# Altium PCB uku207_220_2.PcbDoc (part 3 of 4)
Units mm, origin at the board's own origin, x right, y up, seen from the top; angles counter-clockwise.
Board outline 334.15 x 155.4 mm, 2 copper layers (Top Layer, Bottom Layer); 372 components, 588 nets, 1281 pads, 677 vias.
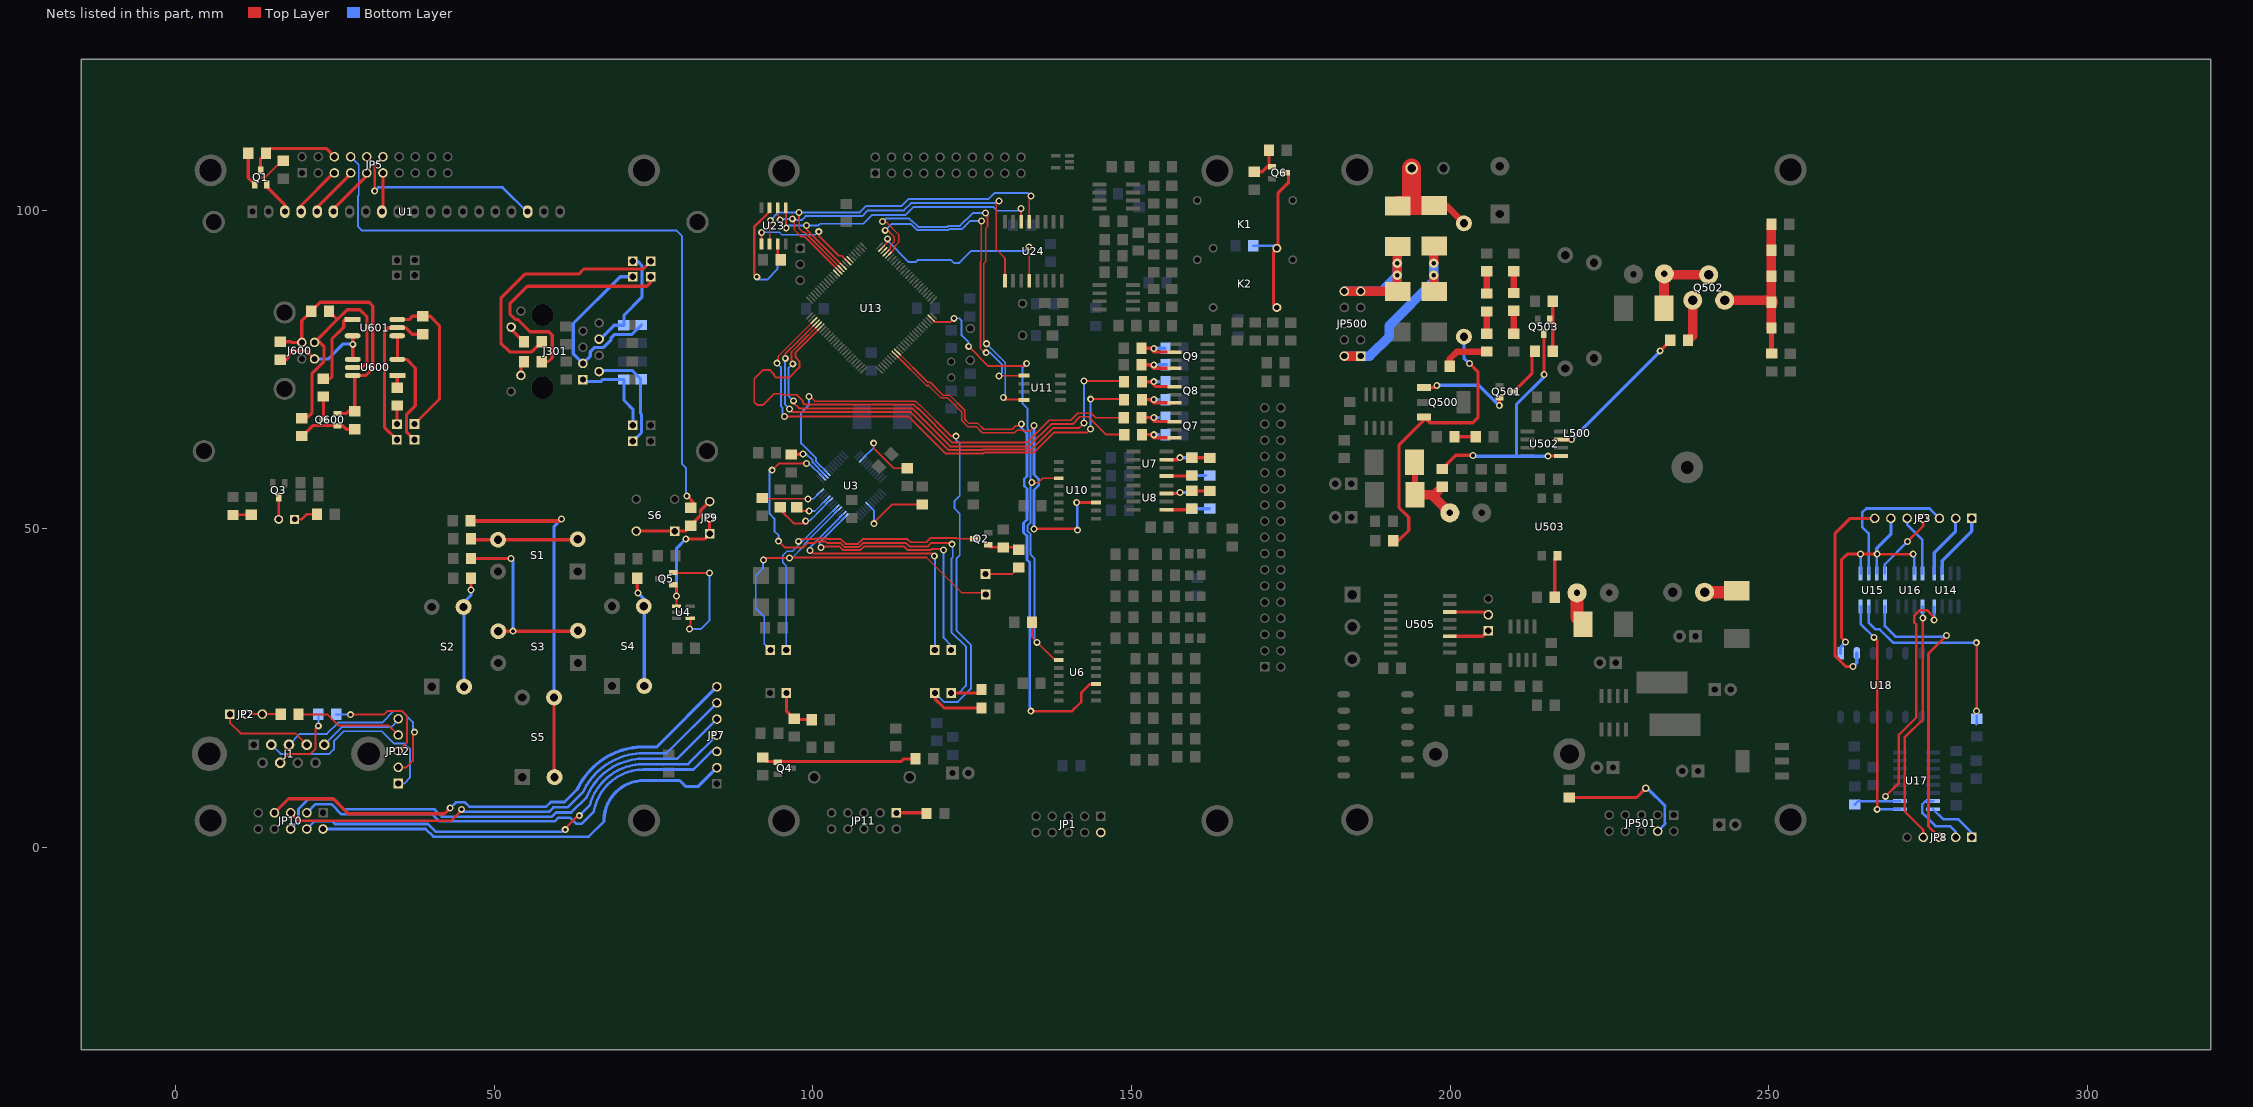
[diagram p3: the nets of this part, all layers, seen from the top]

## Via types
v1: diameter 1.1, hole 0.6, Top Layer to Bottom Layer, 590 vias
v2: diameter 1.3, hole 0.7, Top Layer to Bottom Layer, 36 vias
v3: diameter 1.5, hole 1, Top Layer to Bottom Layer, 18 vias
v4: diameter 1.5, hole 0.7, Top Layer to Bottom Layer, 16 vias
v5: diameter 1.2, hole 0.7, Top Layer to Bottom Layer, 13 vias
v6: diameter 1.4, hole 0.9, Top Layer to Bottom Layer, 3 vias
v7: diameter 1.2, hole 0.6, Top Layer to Bottom Layer, 1 vias

## Nets (pads, with @x,y where several pads share a name; then routed paths per layer and width w, separated by ;. In a path a pad name is that pad's centre, name@x,y a point inside that pad or via, vN(x,y) a via of type N, cw(c..) or ccw(c..) an arc to the next point about the centre after c; other vN are vias at no path point) (continued)
NetC600_1: C600.1 J600.2 U600.4 U601.3 | length 17.4
  Top Layer w0.5: C600.1@16.397,76.553 17.37,76.553 17.726,76.908 17.726,77.272 18.412,77.958 20.516,77.958 J600.2@21.812,76.663 ; U601.3@27.788,80.301 27.81,80.301 v1(27.81,78.97) 27.81,76.599 U600.4@27.812,76.599
  Bottom Layer w0.5: J600.2@21.812,76.663 23.949,76.663 26.307,79.02 v1@27.807,79.02
NetC600_2: C600.2 J600.4 Q600.2 R601.2 R602.1 U600.6 | length 41.3
  Top Layer w0.5: C600.2@16.397,79.353 18.109,79.353 18.199,79.263 J600.4@19.812,79.263 19.812,82.667 R601.2@21.295,84.15 ; R601.2@21.297,84.147 R601.2@21.295,84.15 ; Q600.2@25.406,68.112 26.819,68.112 27.155,68.447 R602.1@28.103,68.447 28.114,68.447 U600.6@28.114,74.059 ; U600.6@27.812,74.059 U600.6@28.114,74.059 ; R601.2@21.295,84.15 22.697,85.552 30.375,85.552 30.959,84.968 30.959,75.202 29.816,74.059 U600.6@28.114,74.059
NetD1_2: D1.2 R8.2 | length 3
  Top Layer w0.4: D1.2@9.017,52.203 11.897,52.203 R8.2@11.95,52.15
NetD3_1: D3.1 JP5.8 | length 106.5
  Top Layer w0.5: v1@80.22,55.264 80.27,55.209 81.438,53.912 D3.1@81.438,53.355
  Bottom Layer w0.3: JP5.8@27.47,108.39 28.75,107.11 28.75,102.35 28.6,102.2 28.6,97.45 29.2,96.85 78.6,96.85 79.45,96 79.45,60.2 80.1,59.55 80.1,55.25 80.153,55.197 80.17,55.214 v1@80.22,55.264
  other v1: 80.22,55.164
NetD3_2: D3.2 JP9.3 S6.1 | length 13.7
  Top Layer w0.5: S6.1@72.309,49.651 S6.1@78.309,49.651 80.009,49.651 D3.2@80.67,50.313 ; D3.2@80.838,50.505 80.838,50.588 82.4,52.15 82.4,52.93 83.792,54.322 JP9.3@83.8,54.33
NetD5_1: D5.1 K1.5 K2.5 Q6.3 | length 26.3
  Top Layer w0.5: K2.5@172.806,84.74 172.3,85.245 172.3,93.534 K1.5@172.806,94.04 173,94.234 173,102.75 174.65,104.4 174.65,105.62 Q6.3@174.394,105.877
  Bottom Layer w0.4: D5.1@169.1,94.45 172.395,94.45 K1.5@172.806,94.04
NetD20_2: 
NetD101_1: 
NetD101_2: 
NetD102_1: 
NetD103_1: 
NetD105_1: 
NetD105_2: 
NetD106_1: 
NetD116_2: 
NetD500_1: 
NetD500_2: D500.2 JP501.4 | length 21.4
  Top Layer w0.5: D500.2@218.651,7.847 229.244,7.847 v5(230.697,9.3)
  Bottom Layer w0.4: 233.7,3.95 233.7,6.55
  Bottom Layer w0.5: v5(230.697,9.3) 230.95,9.3 233.7,6.55 ; JP501.4@232.558,2.56 233.7,3.703 233.7,3.95
  Bottom Layer w0.6: v5(230.697,9.3) v5@230.797,9.4
NetD502_1: D502.1 D503.1 L500.4 R521.1 | length 14
  Top Layer w1: D503.1@194.388,60.471 194.488,60.371 D502.1@194.488,55.37
  Top Layer w1.5: D502.1@194.488,55.37 197.52,55.37 R521.1@198.757,56.607 ; 197.094,55.37 L500.4@199.95,52.513
NetD503_1: 
NetD504_1: D504.1 L500.6 | length 5.3
  Top Layer w2: L500.6@219.905,39.96 219.905,36.014 D504.1@220.866,35.053
NetD505_1: D505.1 D509.2 JP500.9 JP500.10 | length 26.7
  Top Layer w1: D509.2@191.641,87.279 D509.2@191.698,87.222 ; D505.1@191.698,94.274 D505.1@191.748,94.324
  Top Layer w1.5: JP500.10@183.407,87.279 D509.2@191.641,87.279 ; D509.2@191.698,87.222 D505.1@191.698,94.274
  Bottom Layer w1.5: JP500.10@183.407,87.279 JP500.9@185.947,87.279 189.179,87.279 v4(191.7,89.8) v4(191.698,91.7)
NetD505_2: D505.2 D506.2 R508.2 R514.2 | length 17.3
  Top Layer w1: D506.2@197.505,100.735 199.366,100.735 R514.2@202.158,97.943
  Top Layer w3: D505.2@191.854,100.735 D506.2@197.505,100.735 ; 193.947,100.735 193.954,100.741 R508.2@193.954,106.579
NetD506_1: D506.1 D508.2 JP500.1 JP500.2 | length 30.5
  Top Layer w1: D506.1@197.35,94.424 D506.1@197.4,94.424
  Top Layer w1.5: JP500.2@183.407,77.119 JP500.1@185.947,77.119 ; D508.2@197.4,87.322 v4(197.4,89.8) ; v4(197.4,91.7) D506.1@197.4,94.385
  Bottom Layer w1.5: JP500.2@183.407,77.119 187.369,77.119 190.45,80.2 190.45,81.9 197.4,88.85 v4(197.4,91.7)
NetD507_1: D507.1 L500.2 Q502.2 | length 12.4
  Top Layer w1.5: D507.1@233.548,84.627 L500.2@233.548,89.962 ; L500.2@233.756,89.875 Q502.2@240.561,89.875
  Top Layer w2: L500.2@233.548,89.962 L500.2@233.609,90.023 L500.2@233.756,89.876
NetD510_1: D510.1 L500.8 | length 3.7
  Top Layer w2: L500.8@239.911,40.06 D510.1@243.595,40.06
NetDS1_1: DS1.1 R21.1 | length 3.8
  Top Layer w0.4: DS1.1@18.685,51.486 19.778,51.486 20.554,52.262 R21.1@22.194,52.262
NetDS1_2: DS1.2 Q3.3 | length 3.6
  Top Layer w0.4: DS1.2@16.111,51.42 16.204,51.513 16.204,54.945 Q3.3@16.194,54.955
NetFU100_1: 
NetFU500_1: 
NetJ1_2: J1.2 JP12.1 | length 32.4
  Bottom Layer w0.3: J1.2@15.039,16.134 16.472,14.7 24.147,14.7 24.847,15.4 24.847,16.7 26.397,18.25 32.347,18.25 34.297,16.3 35.897,16.3 36.797,15.4 36.797,10.997 35.85,10.05 JP12.1@34.95,10.05
NetJ1_3: J1.3 JP12.2 | length 31.1
  Top Layer w0.3: JP12.2@34.95,12.59 36.24,12.59 37.25,13.6 v1@37.25,18.1
  Bottom Layer w0.3: J1.3@17.809,16.134 19.525,17.85 23.747,17.85 25.497,19.6 32.397,19.6 34.197,21.4 35.55,21.4 37.25,19.7 v1@37.25,18.1
  other v1: 37.5,18.1
NetJ1_4: J1.4 JP2.1 | length 14.8
  Top Layer w0.3: JP2.1@8.539,20.939 8.539,19.559 10.197,17.9 18.812,17.9 J1.4@20.579,16.134
NetJ1_5: J1.5 JP12.5 | length 13.4
  Bottom Layer w0.3: J1.5@23.349,16.134 26.115,18.9 33.85,18.9 34.95,20 JP12.5@34.95,20.21
NetJ1_7: J1.7 R93.2 | length 12.1
  Top Layer w0.3: J1.7@16.424,13.294 17.78,14.65 21.147,14.65 21.947,15.45 21.947,18.65 v1(22.397,19.1)
  Bottom Layer w0.3: v1(22.397,19.1) 22.41,19.112 R93.2@22.41,20.893
NetJ301_1: J301.1 R301.1 X302.1 | length 14.5
  Bottom Layer w0.5: J301.1@63.919,73.421 64.222,73.118 66.717,73.118 67.052,73.454 R301.1@70.363,73.454 70.363,70.173 71.769,68.767 X302.1@71.769,66.266 ; 67.317,73.418 67.319,73.416
NetJ301_2: J301.2 R302.2 X303.1 | length 17.5
  Bottom Layer w0.5: J301.2@66.469,74.691 66.647,74.869 71.618,74.869 72.968,73.519 72.968,73.478 72.968,68.117 73.118,67.967 73.118,65.116 X303.1@71.769,63.766
NetJ301_3: J301.3 R303.1 X304.1 | length 31.5
  Bottom Layer w0.5: X304.1@71.769,89.566 69.761,89.566 62.416,82.221 62.416,77.464 J301.3@63.919,75.961 65.066,77.108 65.066,77.77 65.767,78.47 67.167,78.47 68.317,79.62 68.317,79.92 68.917,80.52 71.618,80.52 R303.1@73.076,81.978
NetJ301_6: J301.6 R304.2 X305.1 | length 17
  Bottom Layer w0.5: J301.6@66.469,79.771 66.668,79.771 68.85,81.954 R304.2@70.363,81.954 70.363,83.516 73.168,86.322 73.168,91.323 72.525,91.966 X305.1@71.769,91.966
NetJ301_10: J301.10 R305.1 | length 2.4
  Top Layer w0.5: J301.10@54.189,74.096 54.189,75.792 R305.1@54.657,76.259
NetJ301_11: J301.11 R306.1 | length 3.1
  Top Layer w0.5: J301.11@52.669,81.666 52.669,81.315 R306.1@54.614,79.37
NetJ600_1: J600.1 R601.1 R604.2 U600.5 | length 37.1
  Top Layer w0.5: R604.2@19.797,67.353 20.545,67.353 21.434,68.242 21.434,74.402 23.288,76.256 23.288,78.678 J600.1@22.258,79.709 ; J600.1@21.812,79.263 J600.1@22.258,79.709 ; R601.1@24.097,84.147 25.397,82.848 ; U600.5@27.812,75.329 29.308,75.329 30.045,76.066 30.045,83.26 28.921,84.384 26.933,84.384 25.397,82.848 ; J600.1@22.258,79.709 25.397,82.848
NetJP1_2: JP1.2
NetJP2_2: JP2.2 JP2.3 R94.2 | length 5.4
  Top Layer w0.3: JP2.2@11.079,20.939 16.477,20.939 R94.2@16.51,20.907
NetJP3_1: JP3.1 U14.2 | length 10.6
  Bottom Layer w0.5: U14.2@277.215,42.997 277.215,45.012 281.85,49.647 JP3.1@281.85,51.648
NetJP3_2: JP3.2 U14.1 | length 10
  Bottom Layer w0.5: U14.1@275.945,42.997 275.945,46.242 279.31,49.607 ; 279.31,49.608 JP3.2@279.31,51.647
NetJP3_3: 
NetJP3_3: 
NetJP3_3: JP3.3 U15.6 | length 23
  Bottom Layer w0.4: U15.6@265.665,42.997 265.665,49.297 264.65,50.312 264.65,52.547 265.3,53.197 275.22,53.197 JP3.3@276.77,51.647
NetJP3_4: JP3.4 U15.8 | length 11.1
  Top Layer w0.4: v1(271.75,47.997) 274.23,50.477 JP3.4@274.23,51.647
  Bottom Layer w0.4: U15.8@268.205,43.047 268.205,44.452 v1(271.75,47.997)
NetJP3_5: JP3.5 U16.8 | length 9.7
  Bottom Layer w0.4: JP3.5@271.69,51.647 271.69,50.657 274.105,48.242 U16.8@274.105,42.997
NetJP3_6: JP3.6 U15.5 U15.7 U16.7 U18.1 | length 42.6
  Top Layer w0.4: v1(267,46.047) v1(272.65,46.047)
  Top Layer w0.5: v1(262.05,32.247) 261.4,32.897 261.4,45.147 262.3,46.047 v1(267,46.047)
  Bottom Layer w0.4: U15.5@264.395,42.997 v1@264.395,46.042 ; U15.7@266.935,43.047 v1@266.935,46.047 ; v1(272.65,46.047) 272.835,45.862 U16.7@272.835,42.997
  Bottom Layer w0.5: U18.1@261.254,30.491 261.254,31.451 v1(262.05,32.247) ; v1@264.395,46.042 v1(264.4,46.047) ; v1(267,46.047) 266.935,46.112 266.935,46.932 269.15,49.147 JP3.6@269.15,51.647
NetJP3_7: JP3.7 U18.2 | length 32.2
  Top Layer w0.5: v1(263.2,28.397) 262.1,28.397 260.4,30.097 260.4,49.297 262.75,51.647 JP3.7@266.61,51.647
  Bottom Layer w0.5: v1(263.2,28.397) 263.804,29.001 U18.2@263.804,30.491
NetJP5_5: JP5.5 U1.4 | length 8.4
  Top Layer w0.5: U1.4@19.693,99.681 19.693,100.693 24.85,105.85 JP5.5@24.93,105.85
NetJP5_6: JP5.6 Q1.3 R1.1 | length 14.6
  Top Layer w0.5: Q1.3@13.352,106.248 13.352,108.104 R1.1@14.197,108.95 14.947,109.7 23.62,109.7 JP5.6@24.93,108.39
NetJP5_7: JP5.7 U1.5 | length 8.3
  Top Layer w0.5: U1.5@22.233,99.681 22.233,100.483 27.47,105.72 JP5.7@27.47,105.85
NetJP5_9: JP5.9 U1.6 | length 8.3
  Top Layer w0.5: U1.6@24.773,99.681 24.773,100.173 30.01,105.41 JP5.9@30.01,105.85
NetJP5_10: JP5.10
NetJP5_11: JP5.11 U1.9 | length 6.2
  Top Layer w0.5: U1.9@32.393,99.681 32.55,99.838 JP5.11@32.55,105.85
NetJP5_12: JP5.12 U1.18 | length 31.8
  Top Layer w0.4: v1(31.25,103) 31.25,107.09 JP5.12@32.55,108.39
  Bottom Layer w0.4: v1(31.25,103) 31.85,103.6 51.334,103.6 U1.18@55.253,99.681
NetJP7_2: JP7.2 JP10.2 | length 68.6
  Bottom Layer w0.4: JP10.2@23.147,2.91 39.24,2.91 40.45,1.7 64.837,1.7 67.235,4.098
  Bottom Layer w0.5: 67.235,4.098 cw(c73.5,4.25) 73.497,10.516 79.1,10.516 80.016,9.6 82.007,9.6 JP7.2@84.948,12.54
NetJP7_3: JP7.3 JP10.3 | length 71.9
  Bottom Layer w0.4: JP10.3@20.607,5.45 21.957,6.8 24.447,6.8 26.047,5.2 40.35,5.2 41.45,4.1 59.5,4.1 60.1,4.7 61.9,4.7 62.85,3.75 63.76,3.75 65.616,5.605 cw(c73.5,4.25) 73.497,12.25 81.247,12.25 84.077,15.08 JP7.3@84.948,15.08
NetJP7_4: JP7.4 JP10.4 | length 72.3
  Top Layer w0.4: v1@61.1,2.95 63.15,5 v1(63.35,5) ; v1(61.15,2.8) v1@61.15,3
  Bottom Layer w0.4: JP10.4@20.607,2.91 21.847,4.15 24.547,4.15 24.997,3.7 39.6,3.7 40.85,2.45 60.6,2.45 v1@61.1,2.95 ; v1(63.35,5) 63.359,5 64.968,6.609 cw(c73.5,4.25) 73.697,13.1 80.427,13.1 JP7.4@84.948,17.62
NetJP7_5: JP7.5 JP10.6 | length 77.4
  Bottom Layer w0.4: JP10.6@18.067,2.91 19.297,4.14 19.297,6.05 20.847,7.6 24.847,7.6 26.447,6 40.65,6 41.8,4.85 59.05,4.85 59.7,5.5 62.08,5.5 64.532,7.952 cw(c73.5,4.25) 73.697,13.95 78.737,13.95 JP7.5@84.948,20.16
NetJP7_6: JP7.6 JP10.5 | length 75.5
  Top Layer w0.4: JP10.5@18.067,5.45 19.317,4.2 43.197,4.2 44.847,5.85 v1(44.847,5.997)
  Bottom Layer w0.4: v1(44.847,5.997) 45.245,5.6 58.6,5.6 59.3,6.3 61.5,6.3 63.95,8.75 ; 63.902,8.648 cw(c73.5,4.25) 63.949,8.749 cw(c73.5,4.25) 73.897,14.8 77.047,14.8 JP7.6@84.948,22.7
NetJP7_7: JP7.7 JP10.7 | length 80
  Top Layer w0.5: JP10.7@15.527,5.45 17.727,7.65 24.747,7.65 27.097,5.3 40.697,5.3 42.2,5.3 v1(43.1,6.2)
  Bottom Layer w0.4: v1(43.1,6.2) 43.974,7.074 44,7.1 45.4,7.1 46.1,6.4 58.15,6.4 58.9,7.15 61.059,7.15 63.025,9.115
  Bottom Layer w0.5: 63.025,9.115 cw(c73.5,4.25) 63.403,9.858 cw(c73.5,4.25) 73.498,15.8 75.547,15.8 ; 75.547,15.84 JP7.7@84.948,25.24
NetJP8_1: JP8.1 U17.8 | length 8.3
  Bottom Layer w0.4: U17.8@275.792,6.011 277.353,4.45 279.7,4.45 281.85,2.3 JP8.1@281.85,1.6
NetJP8_2: JP8.2 U17.7 | length 10.6
  Bottom Layer w0.4: U17.7@275.792,7.281 274.583,7.281 274.1,6.797 274.1,5.397 276.147,3.35 278.45,3.35 279.31,2.49 JP8.2@279.31,1.6
NetJP8_3: JP8.3 U15.1 | length 47.2
  Top Layer w0.4: JP8.3@276.77,1.6 275.05,3.32 275.05,30.447 276.77,32.167 277,32.397 v1(277.9,33.297)
  Bottom Layer w0.4: U15.1@268.205,37.847 268.205,34.742 269.238,33.71 269.85,33.097 277.7,33.097 v1(277.9,33.297)
NetJP8_4: JP8.4 U16.1 | length 38.6
  Top Layer w0.4: v1(274.15,35.997) 274.15,20.097 271.3,17.247 271.3,5.7 274.23,2.77 JP8.4@274.23,1.6
  Bottom Layer w0.4: U16.1@274.105,37.797 274.15,37.752 v1(274.15,35.997)
NetJP9_1: JP9.1 JP9.2 Q5.1 U4.1 | length 19.9
  Top Layer w0.3: Q5.1@78.05,41.25 78.075,41.225 78.625,40.675 v1(78.625,39.45) U4.1@78.625,37.85 ; Q5.1@78.102,41.252 Q5.1@78.149,41.252
  Top Layer w0.5: v1(80.07,48.412) 80.082,48.4 83,48.4 83.8,49.2 83.8,49.212 83.8,51.752 JP9.2@83.8,51.79
  Bottom Layer w0.5: v1(78.625,39.45) 78.625,46.967 v1(80.07,48.412)
NetJP11_1: JP11.1 R15.1 | length 4.8
  Top Layer w0.5: JP11.1@113.1,5.45 117.731,5.45 R15.1@117.838,5.343
NetJP12_3: JP12.3 R93.1 | length 17.7
  Top Layer w0.3: v1(27.447,20.85) 32.697,20.85 33.247,21.4 35.55,21.4 36.3,20.65 36.3,16.48 JP12.3@34.95,15.13
  Bottom Layer w0.3: R93.1@25.21,20.893 25.253,20.85 v1(27.447,20.85)
NetJP12_4: JP12.4 R94.1 | length 17
  Top Layer w0.3: R94.1@19.31,20.907 23.841,20.907 25.597,19.15 33.47,19.15 JP12.4@34.95,17.67
NetJP501_10: 
NetL500_10: 
NetQ1_1: Q1.1 R1.2 R2.1 | length 11.3
  Top Layer w0.3: Q1.1@12.402,104.048 13.504,105.15 14.05,105.15 16.65,107.75 R2.1@16.897,107.75
  Top Layer w0.5: R1.2@11.397,108.95 11.397,105.052 Q1.1@12.402,104.048
NetQ1_2: Q1.2 U1.3 | length 6.2
  Top Layer w0.5: Q1.2@14.302,104.048 14.302,103.698 17.153,100.847 U1.3@17.153,99.781 ; U1.3@17.153,99.681 U1.3@17.153,100.397
NetQ2_1: Q2.1 R14.1 R85.1 | length 5.2
  Top Layer w0.4: Q2.1@127.431,47.511 127.471,47.471 127.843,47.099 R85.1@129.838,47.099 131.949,47.099 R14.1@132.325,46.723
NetQ2_3: Q2.3 U3.17 X2.1 | length 55.5
  Top Layer w0.3: v1(97.75,48.05) 98.1,48.4 100.284,48.4 100.375,48.491 102.212,48.491 102.303,48.4 104.379,48.4 105.132,47.647 107.072,47.647 107.824,48.4 114.85,48.4 115.35,47.9 117.8,47.9 118.5,48.6 122.5,48.6 122.649,48.452 Q2.3@125.302,48.452
  Bottom Layer w0.25: X2.1@95.85,31 95.8,31.05 95.8,44.233 95.274,44.759 95.274,45.812 95.982,46.519 96.854,46.519 98.068,47.732 U3.17@103.635,53.3 ; U3.17@103.6,53.3 U3.17@103.635,53.3 ; U3.17@103.64,53.305 U3.17@103.635,53.3
NetQ4_1: Q4.1 R22.2 R23.2 | length 24.4
  Top Layer w0.5: R23.2@92.15,14.1 92.743,13.507 Q4.1@94.498,13.507 ; Q4.1@94.498,13.398 94.603,13.503 113.879,13.503 114.285,13.91 R22.2@116.092,13.91
NetQ5_2: Q5.2 U4.4 | length 18.6
  Top Layer w0.3: Q5.2@78.1,43.2 78.125,43.175 78.2,43.1 v1(83.8,43.1) ; v1(80.65,34.3) 80.775,34.425 U4.4@80.775,35.95
  Bottom Layer w0.3: v1(80.65,34.3) 82.45,34.3 83.8,35.65 v1(83.8,43.1)
NetQ6_1: Q6.1 R72.2 R74.2 | length 5.4
  Top Layer w0.5: R72.2@169.293,106.026 170.493,106.026 171.291,106.825 Q6.1@172.047,106.825 ; Q6.1@171.55,107.083 171.55,109.384 R74.2@171.55,109.428
NetQ7_2: Q7.2 R31.2 R34.2 | length 6.2
  Top Layer w0.5: R31.2@151.638,67.493 151.644,67.5 152.95,67.5 153.125,67.325 153.175,67.275 153.225,67.225 153.61,66.84 Q7.2@156.762,66.84
  Bottom Layer w0.5: v1@153.5,67.45 154.25,67.45 154.263,67.493
  other v1: 153.5,67.5
NetQ7_4: Q7.4 R38.2 R39.2 | length 6.1
  Top Layer w0.5: R38.2@151.65,64.8 152.95,64.8 153.139,64.611 153.189,64.561 153.239,64.511 153.45,64.3 153.5,64.3 Q7.4@156.762,64.3
  Bottom Layer w0.5: v1(153.5,64.772) 154.172,64.772 154.2,64.8 154.263,64.793
NetQ8_2: Q8.2 R30.2 R77.2 | length 6.2
  Top Layer w0.5: R30.2@151.638,73.093 152.944,73.093 152.95,73.1 153.128,72.922 153.228,72.822 153.715,72.335 Q8.2@156.75,72.335
  Bottom Layer w0.5: v1(153.5,73.093) 154.263,73.093
NetQ8_4: Q8.4 R37.2 R78.2 | length 6.1
  Top Layer w0.5: R37.2@151.638,70.293 152.95,70.293 153.125,70.118 153.175,70.068 153.225,70.018 153.449,69.795 153.5,69.795 Q8.4@156.75,69.795
  Bottom Layer w0.5: v1(153.5,70.293) 154.263,70.293
NetQ9_2: Q9.2 R79.2 R81.2 | length 7.2
  Top Layer w0.5: R79.2@151.588,78.343 152.9,78.343 ; 152.9,78.3 152.9,78.343 ; Q9.2@156.75,77.735 153.565,77.735 153.25,78.05 153.2,78.1 153.15,78.15 152.957,78.343 152.9,78.343
  Bottom Layer w0.5: v1@153.5,78.343 R81.2@155.212,78.343
  other v1: 153.5,78.3
NetQ9_4: Q9.4 R80.2 R82.2 | length 6.7
  Top Layer w0.5: R80.2@151.588,75.743 152.894,75.743 152.9,75.75 153.1,75.55 153.15,75.5 153.2,75.45 153.455,75.195 153.5,75.195 Q9.4@156.75,75.195
  Bottom Layer w0.5: 154.213,75.743 R82.2@155.312,75.743 R82.2@155.5,75.743
  other v1: 153.5,75.75
NetQ10_1: 
NetQ10_3: 
NetQ10_3: 
NetQ11_1: 
NetQ11_1: 
NetQ11_3: 
NetQ500_1: Q500.1 Q501.2 | length 14.5
  Top Layer w0.5: Q500.1@195.9,72.168 197.568,72.168 v1(197.9,72.5) ; v1(207.7,69.35) 207.748,69.398 Q501.2@207.748,70.548
  Bottom Layer w0.5: v1(197.9,72.5) 197.95,72.55 204.5,72.55 v1(207.7,69.35)
NetQ500_3: Q500.3 R514.1 R520.1 | length 46
  Top Layer w0.5: R520.1@191.058,48.157 191.1,48.2 191.95,48.2 193.5,49.75 193.5,51.8 191.95,53.35 191.95,63.15 195.9,67.1 Q500.3@195.9,67.568 196.818,66.65 203.55,66.65 204.35,67.45 204.35,74.65 v1(203.05,75.95)
  Bottom Layer w0.5: R514.1@202.158,80.163 202.158,76.792 203,75.95 v1(203.05,75.95)
NetQ501_1: 
NetQ501_3: Q501.3 R504.2 | length 7.8
  Top Layer w0.5: Q501.3@209.948,71.498 212.85,74.401 212.85,77.401 R504.2@213.306,77.857
NetQ502_1: Q502.1 R522.1 | length 6.6
  Top Layer w1.5: R522.1@237.317,79.577 238.061,80.321 Q502.1@238.061,85.876
NetQ502_3: Q502.3 R523.1 R525.1 R526.1 R527.1 R528.1 R529.1 | length 27.7
  Top Layer w0.8: R525.1@250.398,81.522 250.398,77.552 R523.1@250.443,77.508
  Top Layer w1.5: Q502.3@243.061,85.876 R526.1@250.108,85.876 ; R525.1@250.398,81.522 R529.1@250.398,97.776
  Top Layer w2: R526.1@250.108,85.876 R526.1@250.398,85.585
NetQ503_1: Q503.1 R500.2 R504.1 | length 7.9
  Top Layer w0.5: R500.2@216.092,85.743 216.092,82.358 216.106,82.345 R504.1@216.106,77.857
NetQ503_3: Q503.3 R521.2 U502.5 | length 40.6
  Top Layer w0.5: R521.2@198.757,59.407 200.9,61.55 203.55,61.55 v1(203.6,61.5) ; v1@214.698,74.25 Q503.3@214.698,80.602 ; v1(215.35,61.4) 215.411,61.461 U502.5@217.354,61.461
  Bottom Layer w0.5: v1(203.6,61.5) 203.7,61.4 v1(215.35,61.4) ; 210.4,61.4 210.4,69.55 214.75,73.9 v1(214.75,74.25)
NetQ600_1: Q600.1 R602.2 R604.1 | length 9.2
  Top Layer w0.5: R604.1@19.797,64.553 19.885,64.553 21.544,66.212 Q600.1@25.406,66.212 26.254,66.212 26.819,65.647 R602.2@28.103,65.647
NetQ600_3: Q600.3 R605.1 | length 3.6
  Top Layer w0.5: R605.1@23.197,70.753 23.212,70.753 23.212,67.162 Q600.3@23.206,67.162
NetR3_1: R3.1 S1.2 | length 16.8
  Top Layer w0.5: R3.1@46.362,48.457 46.519,48.3 S1.2@50.6,48.3 63.02,48.3 S1.2@63.1,48.38
NetR3_2: 
NetR3_2: 
NetR3_2: 
NetR3_2: 
NetR3_2: 
NetR3_2: 
NetR3_2: 
NetR4_1: R4.1 S2.2 | length 17.5
  Top Layer w0.5: S2.2@45.2,37.75 S2.2@45.28,37.67 ; v1(46.35,40.4) R4.1@46.35,42.2
  Bottom Layer w0.5: S2.2@45.28,25.25 45.28,37.75 45.28,38.48 46.35,39.55 v1(46.35,40.4)
NetR4_2: 
NetR5_1: R5.1 S3.2 | length 30.3
  Top Layer w0.5: R5.1@46.362,45.357 52.644,45.357 v1(52.65,45.35) ; S3.2@50.65,33.95 v1(52.95,33.95) 63.07,33.95 S3.2@63.15,34.03
  Bottom Layer w0.5: v1(52.65,45.35) 52.95,45.05 v1(52.95,33.95)
NetR5_2: 
NetR6_1: R6.1 S4.2 | length 17.4
  Top Layer w0.5: R6.1@72.45,42.3 72.45,42.257 72.45,40.05 v1(72.55,39.95)
  Bottom Layer w0.5: v1(72.55,39.95) 73.55,38.95 73.55,37.85 S4.2@73.55,25.35
NetR6_2: 
NetR7_1: R7.1 S5.2 | length 55.3
  Top Layer w0.5: S5.2@59.4,11.13 S5.2@59.4,23.55
  Top Layer w0.6: R7.1@46.3,51.25 60.25,51.25 v1(60.55,51.55)
  Bottom Layer w0.5: S5.2@59.4,23.55 59.4,50.4 v1(60.55,51.55)
NetR7_2: 
NetR7_2: 
NetR8_1: 
NetR8_1: 
NetR8_2: 
NetR8_2: 
NetR14_2: R14.2 X15.1 | length 5.7
  Top Layer w0.25: X15.1@127.091,42.919 131.291,42.919 132.31,43.938 R14.2@132.332,43.96
NetR20_1: R20.1 U3.7 | length 12.1
  Top Layer w0.3: v1(109.576,50.812) 109.576,50.976 110.525,51.925 110.9,52.3 112.438,53.838 R20.1@117.157,53.838
  Bottom Layer w0.3: U3.7@108.837,53.658 109.585,52.91 109.585,50.971 109.576,50.962 v1(109.576,50.812)
NetR22_2: 
NetR22_2: 
NetR22_2: 
NetR22_2: 
NetR22_2: 
NetR22_2: 
NetR22_2: 
NetR22_2: 
NetR22_2: 
NetR25_1: 
NetR30_2: 
NetR38_1: 
NetR42_1: R42.1 R43.2 | length 2.6
  Bottom Layer w0.5: R42.1@159.04,58.365 159.052,58.377 159.49,58.377 R43.2@161.647,58.377
NetR42_2: R42.2 U7.3 | length 3.9
  Top Layer w0.5: U7.3@155.499,60.853 157.277,60.853 v1(157.59,61.165)
  Bottom Layer w0.5: v1@157.34,61.165 v1(157.59,61.165) R42.2@159.04,61.165
NetR43_1: 
NetR43_2: 
NetR43_2: 
NetR44_1: R44.1 R45.2 | length 2.6
  Top Layer w0.5: R44.1@159.09,61.165 159.103,61.153 159.484,61.153 R45.2@161.647,61.153
NetR44_2: 
NetR44_2: R44.2 U7.1 | length 4
  Top Layer w0.5: U7.1@155.499,58.313 159.484,58.313 159.488,58.313 R44.2@159.49,58.315
NetR45_2: 
NetR49_1: R49.1 R50.2 | length 2.8
  Bottom Layer w0.5: R49.1@159.484,53.151 162.229,53.151 R50.2@162.241,53.163
NetR49_2: R49.2 U8.3 | length 4.2
  Top Layer w0.5: U8.3@155.489,55.564 157.44,55.564 v1(157.59,55.714)
  Bottom Layer w0.5: v1(157.59,55.714) 159.246,55.714 R49.2@159.484,55.951
NetR51_1: R51.1 R52.2 | length 2.8
  Top Layer w0.5: R51.1@159.484,55.976 159.508,55.951 R52.2@162.297,55.951
NetR51_2: R51.2 U8.1 | length 4.1
  Top Layer w0.5: U8.1@155.488,52.995 159.302,52.995 R51.2@159.484,53.176
NetR52_1: 
NetR53_1: 
NetR57_1: 
NetR60_1: 
NetR69_2: 
NetR83_1: 
NetR86_1: R86.1 R87.1 X6.1 | length 7.4
  Top Layer w0.5: X6.1@95.85,24.25 95.85,21.456 R87.1@97.094,20.212 97.206,20.1 99.838,20.1 R86.1@99.85,20.1
NetR90_2: R90.2 U14.8 U17.10 | length 45
  Top Layer w0.4: v1(268.3,8.047) 270.4,10.147 270.4,17.697 273.15,20.447 273.15,34.997 272.8,35.347 272.8,36.347 273.7,37.247 274.8,37.247 275.95,36.097 v1(275.95,35.697)
  Bottom Layer w0.4: R90.2@263.509,6.76 264.03,7.281 U17.10@270.592,7.281 ; 268.3,7.281 v1(268.3,8.047) ; U14.8@275.945,37.797 275.95,37.792 v1(275.95,35.697)
NetR91_1: R91.1 U15.3 | length 33.6
  Top Layer w0.4: v1(282.55,32.147) 282.6,32.097 v1(282.6,21.447)
  Bottom Layer w0.4: U15.3@265.665,37.847 U15.3@265.665,37.797 265.665,35.282 266.7,34.247 267.4,34.247 269.5,32.147 v1(282.55,32.147) ; 282.557,19.36 282.6,19.403 v1(282.6,21.447)
NetR95_1: R95.1 U23.3 | length 2.4
  Top Layer w0.4: R95.1@94.45,92.35 94.485,92.385 U23.3@94.485,94.7
NetR96_2: R96.2 U23.7 | length 17.7
  Top Layer w0.4: v1(91.2,89.55) 90.8,89.95 90.8,97.35 93.215,99.765 U23.7@93.215,100.4
  Bottom Layer w0.3: v1(91.2,89.55) 91.628,89.122 92.823,89.122 94.45,90.75 94.45,92.207 R96.2@94.45,92.3
NetR104_1: 
NetR104_2: 
NetR105_2: 
NetR110_1: 
NetR110_2: 
NetR112_1: R112.1 U3.26 X8.1 | length 81.1
  Top Layer w0.3: v1(93.624,59.215) 94.659,60.25 v1(99,60.25) ; v1(94.624,48.062) 95.586,47.1 98.513,47.1 99.213,47.8 100.363,47.8 100.574,48.011 102.013,48.011 102.224,47.8 104.3,47.8 104.933,47.167 107.27,47.167 107.903,47.8 114.6,47.8 115.15,47.25 118.05,47.25 118.6,47.8 121.65,47.8 v1(121.85,47.6)
  Top Layer w0.5: X8.1@121.7,24.25 126.47,24.25 R112.1@126.6,24.25 ; R112.1@126.81,24.46 R112.1@126.85,24.5
  Bottom Layer w0.3: v1@93.223,59.215 93.223,52.363 93.974,51.613 93.974,49.663 94.624,49.012 v1(94.624,48.062) ; v1(99,60.25) 99.417,60.25 U3.26@101.518,58.148 ; X8.1@121.7,24.25 122.9,24.25 124,25.35 124,31.55 121.75,33.8 121.75,45.35 121.95,45.55 121.95,47.5 v1(121.85,47.6)
NetR113_1: R113.1 U3.28 X7.1 | length 97
  Top Layer w0.25: v1@99.6,70.75 100.3,70.05 116.05,70.05 116.65,69.45 ; 116.8,69.45 121.7,64.55 v1(122.45,64.55)
  Top Layer w0.5: X7.1@119.1,24.25 X7.1@119.15,24.25 119.15,23.35 120.607,21.893 R113.1@126.47,21.893
  Bottom Layer w0.3: v1(99.4,70.75) 99.4,69.5 98.15,68.25 98.15,63.4 100.5,61.05 100.5,60.581 100.807,60.273 U3.28@102.226,58.855 ; X7.1@119.15,24.25 120.55,22.85 122.75,22.85 124.8,24.9 124.8,31.8 122.55,34.05 122.55,45.4 123.05,45.9 123.05,52.4 122.25,53.2 122.25,54.4 123.05,55.2 123.05,63.4 122.45,64 v1(122.45,64.55)
NetR114_1: R114.1 U3.27 | length 6
  Top Layer w0.5: R114.1@97.5,61.75 97.55,61.7 98.4,61.7 v1(98.45,61.75)
  Bottom Layer w0.3: v1(98.45,61.75) 99,61.75 99.95,60.8 99.95,60.424 U3.27@101.872,58.502
NetR115_1: R115.1 U3.21 | length 5.7
  Top Layer w0.3: R115.1@97.507,53.388 98.081,52.813 v1(99.425,52.813)
  Bottom Layer w0.25: v1(99.425,52.813) 100.32,52.813 U3.21@102.226,54.719
NetR116_1: R116.1 U3.20 | length 12.7
  Top Layer w0.25: R116.1@94.907,53.388 94.907,53.043 96.1,51.85
  Top Layer w0.3: R116.1@94.907,53.388 94.907,53.043 94.907,52.931 96.974,50.863 98.875,50.863 99.075,50.863 v1@99.175,50.963
  Bottom Layer w0.25: v1(98.875,51.263) 99.525,51.263 100.514,52.252 100.514,52.3 U3.20@102.579,54.365
NetR117_2: R117.2 U3.24 | length 9.6
  Top Layer w0.25: R117.2@92.044,54.712 v1(99.238,54.712) v1@99.25,54.7
  Bottom Layer w0.25: v1(99.238,54.712) 100.098,54.712 U3.24@101.165,55.78
NetR120_1: R120.1 U3.39 | length 10.6
  Top Layer w0.25: v1(109.55,63.45) 109.55,62.65 112.688,59.512 R120.1@114.794,59.512
  Bottom Layer w0.3: U3.39@107.776,60.977 109.55,62.75 v1(109.55,63.45)
NetR305_2: R305.2 X307.1 | length 39.3
  Top Layer w0.5: R305.2@57.514,76.269 58.515,76.269 59.115,76.869 59.115,80.37 58.565,80.92 55.614,80.92 53.664,82.871 53.313,82.871 52.463,83.721 52.463,85.321 55.214,88.072 73.919,88.072 74.569,88.722 X307.1@74.569,89.566
NetR306_2: R306.2 X308.1 | length 40.6
  Top Layer w0.5: R306.2@57.457,79.359 55.867,77.77 52.413,77.77 51.05,79.133 51.05,86.2 54.823,89.973 63.266,89.973 64.066,90.773 73.376,90.773 X308.1@74.569,91.966
NetR502_2: R502.2 R519.2 | length 3.3
  Top Layer w0.5: R519.2@200.693,64.459 204.006,64.459 R502.2@204.008,64.457
NetR504_1: 
NetR505_2: 
NetR505_2: 
NetR509_1: R509.1 R510.2 | length 3.5
  Top Layer w1: R510.2@205.766,86.914 R509.1@205.766,90.416
NetR510_1: R510.1 R511.2 | length 3.5
  Top Layer w1: R511.2@205.766,80.612 R510.1@205.766,84.114
NetR511_1: R511.1 R512.2 | length 7.4
  Top Layer w1: R512.2@199.942,75.554 199.942,76.692 201.062,77.812 R511.1@205.766,77.812
NetR515_1: R515.1 R516.2 | length 3.4
  Top Layer w1: R516.2@209.955,87.012 R515.1@209.955,90.415
NetR516_1: R516.1 R517.2 | length 3.6
  Top Layer w1: R517.2@209.955,80.612 R516.1@209.955,84.212
NetR522_2: R522.2 U502.7 | length 23.7
  Top Layer w0.5: U502.7@217.354,64.001 v1(219.049,64.001) ; v1(232.95,77.95) 234.517,79.517 R522.2@234.517,79.577
  Bottom Layer w0.5: v1(219.049,64.001) 232.95,77.902 v1(232.95,77.95)
NetR530_2: R530.2 U503.2 | length 6.9
  Top Layer w0.5: R530.2@216.277,39.415 R530.2@216.4,39.293 216.4,45.35 U503.2@216.85,45.8
NetR600_1: R600.1 X601.1 | length 3
  Top Layer w0.5: X601.1@34.748,66.453 34.744,66.457 34.744,69.353 R600.1@34.797,69.353
NetR600_2: R600.2 U600.1 | length 1.9
  Top Layer w0.5: R600.2@34.797,72.153 34.795,72.153 34.795,74.059 U600.1@34.812,74.059
NetR603_1: R603.1 U601.5 X602.1 | length 24.5
  Top Layer w0.5: X602.1@34.744,63.964 32.813,65.895 32.813,81.012 33.372,81.571 U601.5@34.788,81.571 36.139,81.571 37.157,80.553 R603.1@38.797,80.553
NetR603_2: R603.2 U601.6 X600.1 | length 24.5
  Top Layer w0.5: U601.6@34.788,82.841 36.645,82.841 37.157,83.353 R603.2@38.797,83.353 39.976,83.353 41.424,81.905 41.424,70.386 X600.1@37.497,66.459
NetR605_2: R605.2 U601.1 | length 12.5
  Top Layer w0.5: R605.2@23.197,73.553 24.228,73.553 24.558,73.883 24.558,79.812 26.387,81.641 26.387,82.682 26.546,82.841 U601.1@27.788,82.841
NetS2_1: 
NetU1_1: 
NetU1_4: 
NetU1_5: 
NetU3_13: U3.13 X4.1 | length 43.1
  Top Layer w0.3: v1@101.324,46.861 101.399,46.936 101.674,47.211 104.211,47.211 104.734,46.687 107.469,46.687 107.993,47.211 114.328,47.211 114.878,46.661 118.479,46.661 118.668,46.85 120.35,46.85 v1(120.5,46.7)
  Bottom Layer w0.3: v1@101.05,46.75 101.05,47.061 101.05,47.887 U3.13@105.054,51.89 ; v1(120.5,46.7) 120.5,32.9 121.7,31.7 X4.1@121.7,31
  other v1: 101.274,47.061
NetU3_14: U3.14 X3.1 | length 42.1
  Top Layer w0.3: v1@99.574,46.661 v1(99.574,46.611) 100.074,46.111 118.69,46.111 v1(119.05,45.75)
  Bottom Layer w0.3: v1@99.424,46.961 U3.14@104.7,52.244 ; v1(119.05,45.75) 119.15,45.65 X3.1@119.15,31
NetU3_16: U3.16 X1.1 X16.1 | length 64.3
  Top Layer w0.25: v1(96.35,45.45) 96.41,45.51 117.828,45.51 123.33,40.009 126.831,40.009 X16.1@127.131,39.709
  Top Layer w0.3: v1@92.172,45.51 92.232,45.45 92.273,45.45 v1(96.35,45.45)
  Bottom Layer w0.25: v1@92.172,45.51 92.172,45.111 92.172,43.81 91.022,42.66 91.022,37.558 92.373,36.207 92.373,31.977 X1.1@93.35,31 ; X1.1@93.3,31.05 X1.1@93.35,31 ; X1.1@93.3,31.05 X1.1@93.35,31 ; v1@96.386,45.45 96.713,45.45 98.625,47.362 98.625,47.583 U3.16@103.993,52.951
  other v1: 92.273,45.111
NetU5_1: 
NetU8_3: 
NetU8_7: 
NetU8_8: 
NetU11_5: 
NetU14_3: 
NetU14_4: 
NetU14_5: 
NetU14_6: 
NetU14_12: 
NetU14_13: 
NetU14_14: 
NetU15_3: 
NetU15_3: 
NetU15_3: 
NetU15_3: 
NetU15_4: U15.4 U17.9 | length 38.8
  Top Layer w0.4: v1(266.5,32.997) 267,32.497 v1(267,5.997)
  Bottom Layer w0.4: U15.4@264.395,37.847 264.395,35.102 v1(266.5,32.997) ; v1(267,5.997) 267.013,6.011 U17.9@270.592,6.011 268.339,6.011
NetU15_5: 
NetU15_5: 
NetU15_5: 
NetU15_5: 
NetU15_5: 
NetU15_5: 
NetU15_7: 
NetU15_7: 
NetU15_9: 
NetU15_10: 
NetU15_15: 
NetU16_3: 
NetU16_4: 
NetU16_6: 
NetU19_4: 
NetU21_1: 
NetU21_2: 
NetU103_4: 
NetU503_4: 
NetU505_3: U505.3 X500.1 | length 6.4
  Top Layer w0.5: U505.3@199.922,33.145 205.129,33.145 X500.1@205.995,34.012
NetU505_6: U505.6 X501.1 | length 6.3
  Top Layer w0.5: U505.6@199.922,36.955 205.552,36.955 X501.1@205.995,36.512
NetU600_3: U600.3 U601.4 X607.1 | length 19.5
  Top Layer w0.5: U601.4@34.788,80.301 34.82,80.301 U600.3@34.82,76.599 ; U600.3@34.812,76.599 36.255,76.599 37.614,75.24 37.614,69.296 36.217,67.899 36.217,65.239 X607.1@37.497,63.959
NetX11_1: 
NetX13_1: 
NetX15_1: 
NetX19_1: 
NetX23_1: 
NetX32_1: 
NetX33_1: 
OFF1: 
OFF2: 
P0_0: U11.4 U13.46 | length 59.5
  Top Layer w0.25: v1@110.95,98.1 110.9,98.15 110.9,98.2 110.95,98.15 111.5,98.15 113.45,96.2 113.45,94.95 112.7,94.2 112.7,93.807 U13.46@111.852,92.959 ; v1(127.1,99.55) 127.4,99.25 127.4,97.45 127.1,97.15 127.1,91.95 126.8,91.65 126.8,79.5 v1(127.25,79.05) ; v1@129.883,70.3 133.1,70.3 133.153,70.247 U11.4@133.172,70.228 ; U11.4@133.1,70.25 133.145,70.25 U11.4@133.15,70.245 133.167,70.228 U11.4@133.172,70.228 ; U11.4@133.2,70.2 U11.4@133.172,70.228
  Bottom Layer w0.25: v1@127.1,99.5 v1(127.1,99.55) ; v1(127.25,79.05) 130.2,76.1 130.2,71.05 v1@129.825,70.675
  Bottom Layer w0.3: v1(110.95,98.25) 111.4,98.7 115.1,98.7 115.47,98.33 115.549,98.33 116.499,97.38 121.101,97.38 121.251,97.53 123.08,97.53 125.1,99.55 v1(127.1,99.55)
  other v1: 129.883,70.618
P0_1: U11.1 U13.47 | length 52
  Top Layer w0.25: v1(111.35,96.85) 111.5,97 111.6,97 112.75,95.85 112.75,95.05 112.15,94.45 112.15,93.964 U13.47@111.498,93.312 ; v1(126.45,98.3) 126.45,92.1 126.335,91.985 126.335,91.884 126.3,91.848 126.3,78.3 126.95,77.65 v1(127.2,77.65) v1@127.25,77.65 ; v1(129.2,74) 129.255,74.055 U11.1@133.15,74.055
  Bottom Layer w0.3: v1(111.35,96.85) 112.35,97.85 115.35,97.85 116.3,96.9 121.3,96.9 121.45,97.05 123.4,97.05 123.8,97.45 ; 123.85,97.45 123.8,97.45 ; v1(126.45,98.3) 124.65,98.3 123.8,97.45 ; v1(127.2,77.65) 127.8,77.65 129.7,75.75 129.7,74.5 v1(129.2,74)
P0_2: R15.2 U13.98 | length 94.6
  Top Layer w0.25: v1(104.65,73.5) 105.121,73.5 U13.98@107.256,75.634 ; v1(106.35,72.4) 106.782,71.968 116.932,71.968 117.35,71.55 117.7,71.55 ; 117.75,71.55 117.7,71.55 ; v1@124.9,64.75 124.5,64.75 124.3,64.75 122.35,66.7 122.35,67.95 120.65,69.65 119.6,69.65 117.725,71.525 117.7,71.55
  Top Layer w0.5: R15.2@120.797,5.3 123.297,5.3 124.047,6.05 v5(126.8,6.05)
  Bottom Layer w0.3: v1(104.65,73.5) 106,72.15 v1@106.1,72.15 ; v1(124.5,64.6) 124.5,63.65 124.15,63.3 124.15,34.35 125.325,33.175 126.08,32.42 126.08,25.825 126.8,25.105 126.8,10 127.397,9.403 127.397,6.647 v5(126.8,6.05)
P0_2: 
P0_2: 
P0_2: 
P0_2: 
P0_2: 
P0_3: JP11.3 R92.1 U13.99 | length 105.6
  Top Layer w0.25: U13.99@107.609,75.281 105.85,73.522 105.85,73.3 105.331,72.781 105.331,72.069 105.9,71.5 116.7,71.5 117.15,71.05 117.5,71.05 119.35,69.2 120.408,69.2 121.8,67.807 v1(121.8,65.8) ; v1(123.25,53.85) 123.263,53.838 R92.1@125.188,53.837 R92.1@125.507,53.838
  Top Layer w0.3: v5(110.6,8.95) 110.65,8.9 113.5,8.9 113.95,8.45 117.85,8.45 118.2,8.8 126.2,8.8 126.25,8.85 v5(126.25,8.9)
  Bottom Layer w0.3: JP11.3@110.56,5.45 110.56,8.91 v5(110.6,8.95) ; v1(121.8,65.8) 122.8,65.8 123.5,65.1 123.5,64 123.6,63.9 123.6,34 124.486,33.114 ; 124.48,33.107 125.43,32.157 125.43,25.555 126.25,24.736 v5(126.25,8.9)
P0_3: 
P0_3: 
P0_3: 
P0_3: 
P0_3: 
P0_3: 
P0_4: R31.1 U13.81 | length 85.1
  Top Layer w0.3: U13.81@101.245,81.645 97.3,77.7 97.3,76.9 97.9,76.3 97.9,75.35 96.3,73.75 94.247,73.75 93.897,74.1 93.897,74.303 93.25,74.95 92.2,74.95 90.8,73.55 90.8,69.9 91.25,69.45 92.2,69.45 93.95,71.2 95.05,71.2 95.2,71.05 97.5,71.05 98.45,70.1 98.45,69.8 98.75,69.5 115.8,69.5 116.4,68.9 ; 116.5,68.9 121.85,63.55 133.6,63.55 137.1,67.05 140.45,67.05 141.55,68.15 143.7,68.15 144.407,67.443 R31.1@148.788,67.443
P0_5: R38.1 U13.80 | length 72.5
  Top Layer w0.25: v1(96.85,75.9) 96.65,76.1 96.65,77.75 97.85,78.95 ; 97.847,78.953 U13.80@100.892,81.998
  Top Layer w0.3: v1(96.95,70.1) 96.95,69.8 97.85,68.9 115.6,68.9 121.55,62.95 133.9,62.95 137.4,66.45 140.75,66.45 141.9,67.6 143.2,67.6 146,64.8 R38.1@148.85,64.8
  Bottom Layer w0.3: v1(96.85,75.9) 96.15,75.2 96.15,70.9 v1(96.95,70.1)
P0_6: R30.1 U13.79 | length 79.2
  Top Layer w0.25: v1(95.678,76.77) 95.678,77.478 96.55,78.35 ; 96.561,78.339 U13.79@100.538,82.317
  Top Layer w0.3: v1@96.45,68.65 96.75,68.35 115.3,68.35 121.25,62.4 126.685,62.4 126.755,62.47 134.32,62.47 137.65,65.8 141.75,65.8 v1(142.55,66.6) ; v1(142.55,73.2) 148.731,73.2 R30.1@148.838,73.093
  Bottom Layer w0.3: v1(95.678,76.77) 95.6,76.692 95.6,69.55 v1(96.35,68.8) ; v1(142.55,66.6) v1(142.55,73.2)
P0_7: R37.1 U13.78 | length 79.3
  Top Layer w0.25: v1(94.4,76) 94.6,76.2 94.6,77.121 U13.78@100.184,82.705
  Top Layer w0.3: v1(95.55,67.65) 115,67.65 120.85,61.8 126.764,61.8 126.954,61.99 134.74,61.99 137.9,65.15 143.05,65.15 v1(143.55,65.65) ; v1(143.6,70.35) R37.1@148.55,70.35
  Bottom Layer w0.3: v1(94.4,76) 95,75.4 95,69.25 95.25,69 v1@95.25,67.85 ; v1(143.55,65.65) 143.55,70.3 v1(143.6,70.35)
P0_8: R79.1 U13.77 | length 93.2
  Top Layer w0.25: v1@93.45,76.7 95.035,78.285 95.056,78.285 U13.77@99.831,83.059
  Top Layer w0.3: v1(94.25,68.4) 94.25,67.45 95,66.7 96,66.7 96.35,67.05 114.55,67.05 120.55,61.05 126.692,61.05 127.152,61.51 135.102,61.51 137.992,64.4 v1(144.55,64.4) ; v1(144.3,78.4) 145.631,77.069 147.587,77.069 148.788,78.27 R79.1@148.788,78.343
  Top Layer w0.5: R79.1@148.788,78.35 R79.1@148.8,78.35
  Bottom Layer w0.3: v1@93.45,76.7 93.3,76.55 93.3,75.8 94.4,74.7 v1@94.4,68.35 ; v1(144.3,78.4) 144.35,78.35 144.35,75.55 144.55,75.35 v1(144.55,64.4)
  other v1: 93.4,76.8
P0_8: 
P0_8: 
P0_8: 
P0_8: 
P0_8: 
P0_8: 
P0_8: 
P0_8: 
P0_8: 
P0_8: 
P0_8: 
P0_8: 
P0_8_: 
P0_8_: 
P0_8_: 
P0_9: R80.1 U13.76 | length 93.6
  Top Layer w0.25: v1@92.497,77.8 93.865,77.8 95.225,79.16 U13.76@99.477,83.413
  Top Layer w0.3: v1@93.65,66.55 94.25,66.55 94.65,66.15 96.25,66.15 96.6,66.5 114.15,66.5 120.2,60.45 126.771,60.45 127.351,61.03 135.301,61.03 138.121,63.85 142.95,63.85 143.6,63.2 v1(145.45,63.2) ; v1(145.4,75.85) R80.1@148.681,75.85
  Bottom Layer w0.3: v1@92.497,77.8 92.497,75.75 93.7,74.547 93.7,69.35 93.25,68.9 93.25,67 v1(93.65,66.6) ; v1(145.4,75.85) 145.45,75.8 v1(145.45,63.2)
  other v1: 92.397,77.85
P0_9: 
P0_9: 
P0_9_: 
P0_9_: 
P0_9_: 
P0_9_: 
P0_10: U13.48
P0_11: U13.49 U24.4 | length 32.5
  Top Layer w0.25: U13.49@110.791,94.019 111.728,94.956 v1(111.728,95.524) ; v1(133.884,94.224) 133.95,94.224 133.965,94.208 U24.4@133.965,88.925
  Bottom Layer w0.3: v1(111.728,95.524) 111.728,95.224 115.079,91.873 116.129,91.873 116.429,92.173 121.681,92.173 122.131,91.723 122.981,91.723 124.881,93.624 133.284,93.624 v1(133.884,94.224)
P0_13: 
P0_15: U13.62 U23.6 U24.1 | length 62.5
  Top Layer w0.25: U23.6@94.485,100.4 94.485,99.19 94.874,98.801 v1(94.874,98.45) ; v1(96.774,98.65) 97.05,98.374 97.05,96.97 98.17,95.85 98.707,95.85 U13.62@104.074,90.484 ; v1(129.183,101.426) 128.8,101.043 128.8,93.823 130.155,92.468 U24.1@130.155,88.925
  Bottom Layer w0.3: v1(94.874,98.45) 95.074,98.65 v1(96.774,98.65) 97.05,98.65 97.25,98.45 98.225,98.45 98.85,99.075 107.727,99.075 108.628,99.975 114.279,99.975 115.429,101.125 128.882,101.125 v1(129.183,101.426)
P0_16: U13.63
P0_17: U13.61 U23.2 U24.13 | length 62.5
  Top Layer w0.25: U23.2@93.215,94.7 93.215,98.266 v1(93.324,98.375) ; v1(97.825,99.65) 97.85,97.124 98.45,96.524 98.74,96.524 U13.61@104.427,90.837 ; U24.13@133.965,98.175 133.965,101.957 v1(134.234,102.226)
  Bottom Layer w0.3: v1(93.324,98.375) 94.598,99.65 v1(97.825,99.65) 107.377,99.65 108.403,100.675 113.929,100.675 115.029,101.776 127.582,101.776 128.482,102.676 133.784,102.676 v1(134.234,102.226)
P0_18: U13.60 U23.5 U24.14 | length 52.3
  Top Layer w0.25: v1(99.025,97.625) 99.025,96.946 U13.60@104.781,91.191
  Top Layer w0.3: v1@95.75,97.725 95.755,97.73 U23.5@95.755,100.4 ; U24.14@132.683,98.175 v1(132.683,100.275) v1@132.683,100.475
  Bottom Layer w0.3: v1@95.75,97.725 95.85,97.625 v1(99.025,97.625) 100.875,97.625 101.125,97.875 107.927,97.875 109.328,99.275 114.579,99.275 115.779,100.475 128.382,100.475 128.932,99.925 132.333,99.925 v1(132.683,100.275)
  other v1: 95.824,97.224
P0_19: U13.59
P0_19: 
P0_20: U13.58 U23.1 | length 18.1
  Top Layer w0.25: U23.1@91.945,94.7 91.945,96.496 v1(91.973,96.524) ; v1(100.925,96.624) 100.925,96.001 104.076,92.85 104.536,92.85 U13.58@105.488,91.898
  Bottom Layer w0.25: v1(91.973,96.524) 92.023,96.574 94.724,96.574 95.174,96.124 100.425,96.124 v1(100.925,96.624)
P0_21: U13.57
P0_23: U6.3 U13.9 | length 85.1
  Top Layer w0.25: U13.9@113.266,77.756 118.022,73 118.4,73 120.4,71 121.45,71 123.85,68.6 123.85,67.2 124.5,66.55 125.9,66.55 126.8,65.65 131.3,65.65 131.85,66.2 132.7,66.2 v1@132.9,66.2
  Top Layer w0.4: v1(134.2,21.4) 140.686,21.4 142.086,22.8 142.086,24.256 143.467,25.638 U6.3@144.43,25.638
  Bottom Layer w0.4: v1@132.65,66.45 v1(132.7,66.45) 132.7,65.9 133.6,65 133.6,58.281 133.184,57.865 133.184,56.714 133.6,56.298 133.6,51.45 133.05,50.9 133.05,49.45 133.6,48.9 133.6,45.15 134.05,44.7 134.05,21.55 v1(134.2,21.4)
P0_24: U10.3 U13.8 | length 58.8
  Top Layer w0.25: U13.8@112.912,77.402 117.815,72.5 118.15,72.5 120.1,70.55 121.15,70.55 123.35,68.35 123.35,67 124.3,66.05 125.65,66.05 126.6,65.1 131.65,65.1 132.05,65.5 132.9,65.5 133.05,65.35 134.1,65.35 v1@134.6,65.85
  Top Layer w0.4: v1(134.7,50) 141.3,50 v1(141.5,49.8) ; v1(141.405,54.145) U10.3@144.425,54.145
  Bottom Layer w0.4: v1@134.6,65.85 134.7,65.75 134.7,58.549 135.434,57.815 135.434,56.814 134.7,56.08 v1(134.7,50) ; v1(141.405,54.145) 141.5,54.05 v1(141.5,49.8)
  other v1: 134.7,66.2
P0_25: C28.1 R40.1 R41.1 U13.7 | length 112.4
  Top Layer w0.25: U13.7@112.559,77.049 117.558,72.05 117.9,72.05 119.85,70.1 120.9,70.1 122.9,68.1 122.9,66.8 124.1,65.6 125.4,65.6 126.5,64.5 v1(132.55,64.5)
  Top Layer w0.4: v1(133.45,17.25) v1(146.75,17.25) ; v1(146.75,28) 152.345,28 153.601,26.745 153.789,26.557 v1(155.289,26.557) 157.174,26.557 R41.1@157.188,26.543
  Bottom Layer w0.3: 152.297,26.553 C28.1@153.397,26.553
  Bottom Layer w0.4: v1@132.55,64.45 132.9,64.1 132.9,58.401 132.604,58.105 132.604,56.474 132.9,56.178 132.9,51.65 132.45,51.2 132.45,49.2 132.9,48.75 132.9,44.7 133.35,44.25 133.35,22.15 133.2,22 133.2,20.3 133.45,20.05 v1(133.45,17.25) ; v1(146.75,17.25) v1(146.75,28) ; C28.1@153.397,26.553 155.286,26.553 v1(155.289,26.557)
P0_25: 
P0_25: 
P0_25: 
P0_25: 
P0_25: 
P0_25: 
P0_25: 
P0_25: 
P0_25: 
P0_25: 
P0_27: D11.2 R71.1 U13.25 | length 125.1
  Top Layer w0.25: U13.25@118.923,83.413 118.972,83.413 123.431,87.872 123.431,87.921 124.33,87.921 v1(125.23,88.821) ; v1(146.337,78.42) 147.737,79.82 151.788,79.82 ; v1(146.35,31.1) 152.596,31.1 153.389,30.308 153.389,29.757 153.446,29.7 153.503,29.643 R71.1@157.188,29.643 157.19,29.645 R71.1@157.19,29.657 ; 151.788,79.8 157.6,79.8 159.189,81.389 159.189,82.62 ; D11.2@152.95,29.55 D11.2@153.405,29.55 ; v1(158.55,86.05) 158.55,84.711 159.29,83.971 159.29,82.721 159.189,82.62 ; 159.189,82.67 159.189,82.62
  Bottom Layer w0.3: v1(125.23,88.821) 126.379,88.821 129.55,85.65 130.383,85.65 ; 130.4,85.65 130.383,85.65 ; v1(146.337,78.42) 147.65,77.107 147.65,65.2 148.2,64.65 148.2,50.626 145.937,48.362 145.937,31.513 v1(146.35,31.1) ; v1(158.55,86.05) 151.26,86.05 149.938,87.372 132.105,87.372 130.383,85.65
P0_27: 
P0_27: 
P0_27: 
P0_27: 
P0_27: 
P0_27: 
P0_27: 
P0_27: 
P0_27: 
P0_27: 
P0_27: 
P0_27: 
P0_28: R10.1 U6.11 U10.11 U13.24 | length 78.1
  Top Layer w0.25: v1(134.35,57.264) 135.384,57.264 136.075,57.955 U10.11@138.575,57.955 ; R10.1@134.384,35.309 134.384,33.008 v1(135.184,32.208) 137.944,29.448 U6.11@138.58,29.448
  Top Layer w0.3: U13.24@118.569,83.059 119.178,82.45 121.55,82.45 v1(122.15,83.05) ; v1(124.45,78.65) 127.55,75.55 ; 127.532,75.569 133.132,75.569 ; 133.15,75.55 v1(133.55,75.95)
  Bottom Layer w0.3: v1(122.15,83.05) 122.95,83.05 123.35,82.65 123.35,80.35 124.45,79.25 v1(124.45,78.65) ; v1(133.55,75.95) 132.9,75.3 132.9,69.65 133.65,68.9 133.65,65.7 134.15,65.2 134.15,57.264 134.15,50.95 ; 134.1,50.95 133.7,50.55 133.7,49.6 134.15,49.15 134.15,45.95 134.8,45.3 v1@134.8,32.208